# Altium PCB micro_mousev1.0.PcbDoc
Units mil, origin at the board's own origin, x right, y up, seen from the top; angles counter-clockwise.
Board outline 4698.17 x 3354.31 mil, 2 copper layers (Top Layer, Bottom Layer); 38 components, 52 nets, 196 pads, 25 vias.
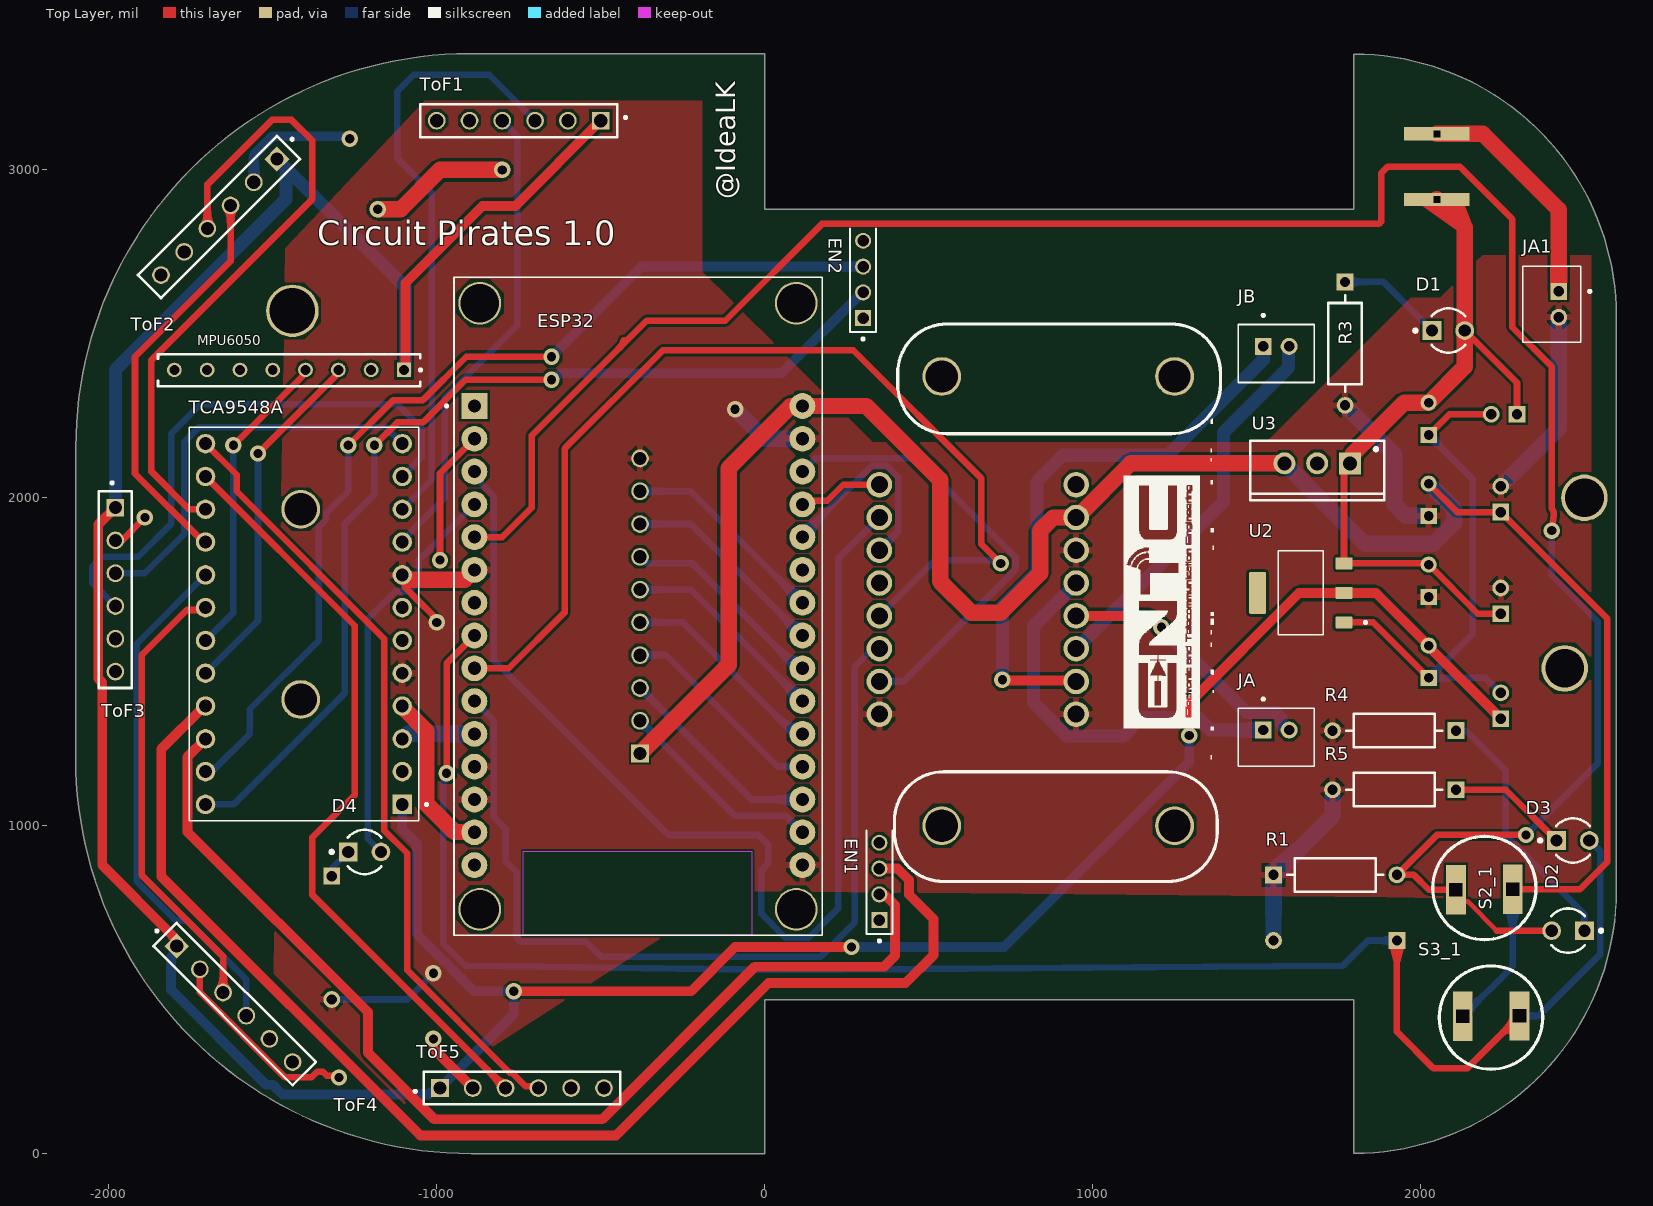
[diagram p0: Top Layer view]
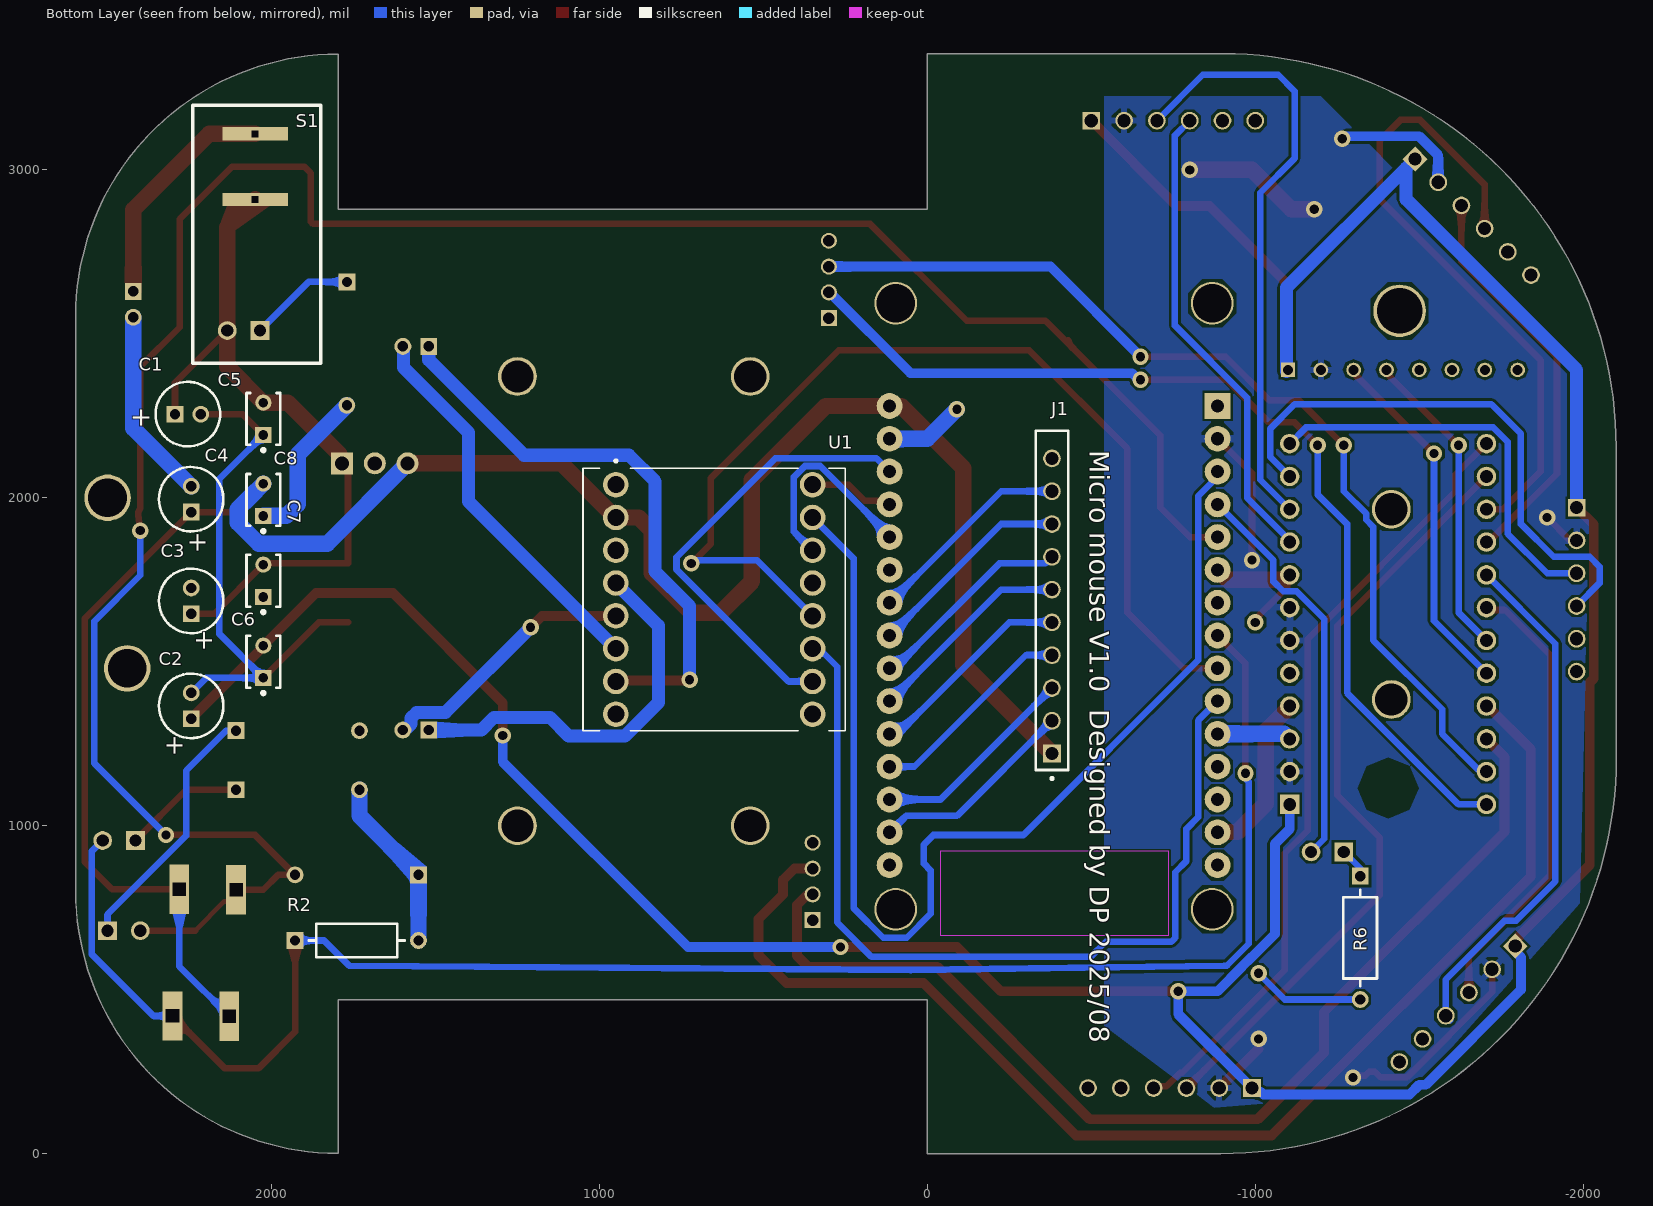
[diagram p1: Bottom Layer view, seen from below]
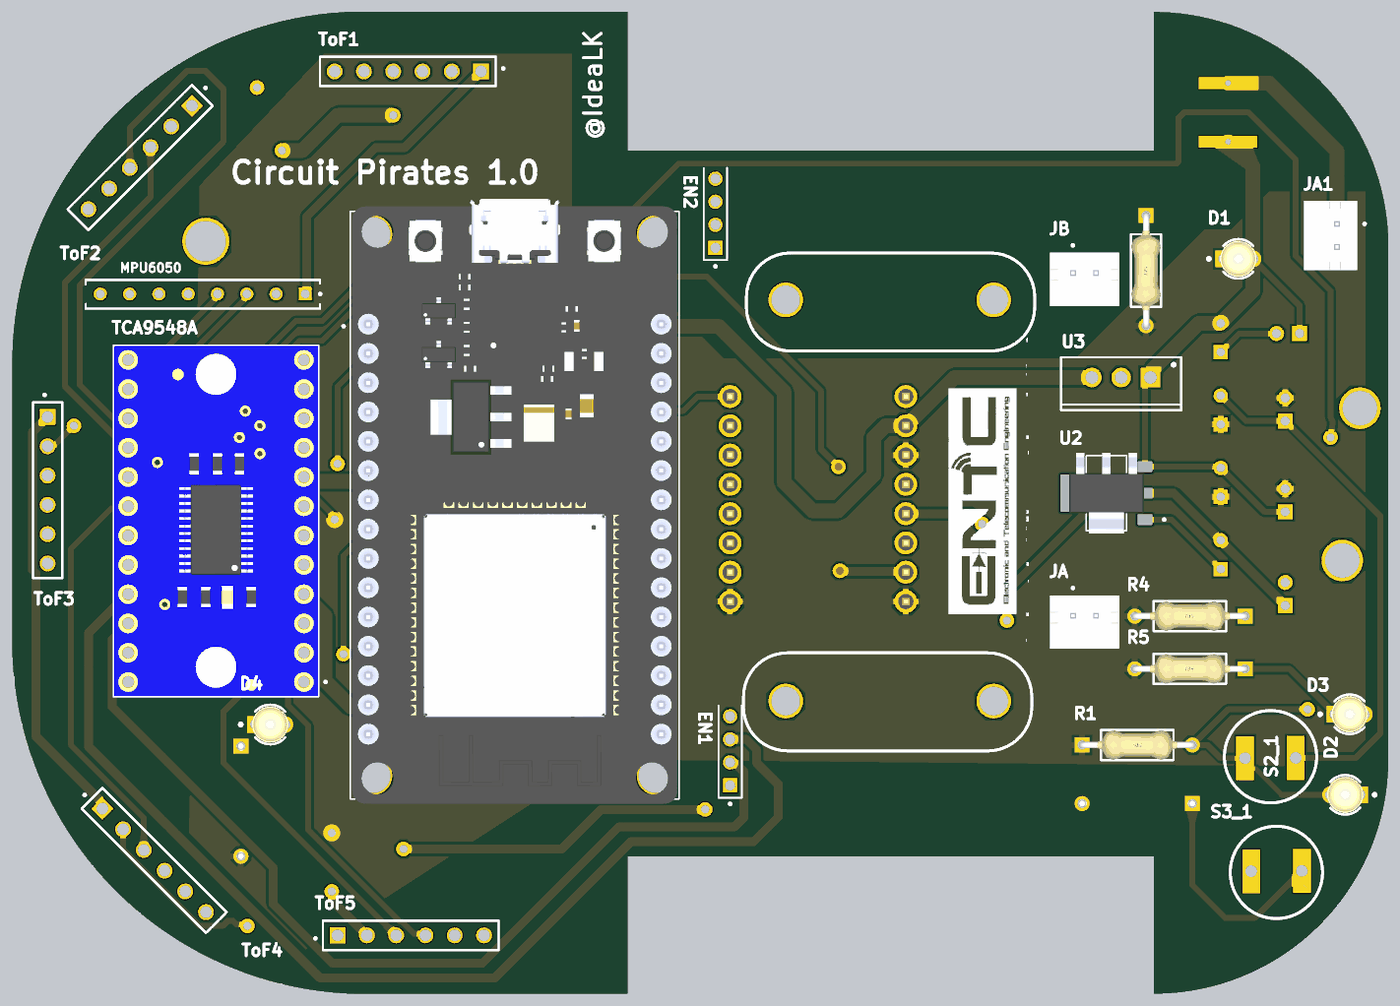
[diagram p2: 3D render of the assembled board from above, using the file's embedded part models]

## Layer stack, top to bottom
Top Solder: solder mask 0.4, Solder Resist, Dk 3.5
Top Layer: signal copper 1.4
Dielectric 1: dielectric 12.6, FR-4, Dk 4.8
Bottom Layer: signal copper 1.4
Bottom Solder: solder mask 0.4, Solder Resist, Dk 3.5

## Board outline
-895,0 -845,0 0,0 0,470 1797,470 1797,1 ccw(c1797,801) 2597,801 2597.19,801.19 2597.19,2552.81 ccw(c1797.19,2552.81) 1797.19,3352.81 1797.19,2880 0,2880 0,3354.31 -900.52,3354.31 ccw(c-900.52,2154.31) -2100.52,2154.31 -2100.52,1442.72 -2100.98,1205.98 ccw(c-895,1205.98)

## Design rules (kind name [scope] priority, off if disabled: settings)
BoardOutlineClearance [All] p1: gap=11.81 ignorepadtopadclearanceinfootprint=FALSE except(15.75: Arc-SplitBarrior Arc-SplitContinuation Track-SplitBarrior Track-SplitContinuation SMDPad-SplitBarrior SMDPad-SplitContinuation THPad-SplitBarrior THPad-SplitContinuation Via-SplitBarrior Via-SplitContinuation Fill-SplitBarrior Fill-SplitContinuation Poly-SplitBarrior Poly-SplitContinuation Region-SplitBarrior Region-SplitContinuation Text-SplitBarrior Text-SplitContinuation)
Clearance "Clearance Different Nets" [All] p1: gap=7.87 ignorepadtopadclearanceinfootprint=FALSE except(3.5: Arc-Arc Arc-Track Arc-SMDPad Track-Track Track-SMDPad; 5: SMDPad-SMDPad SMDPad-Via THPad-Via Via-Via; 10: Arc-Via Arc-Text Track-Via Track-Text SMDPad-Text THPad-Text Via-Text Fill-Text Poly-Text Region-Text Text-Text; 19.68: THPad-THPad Via-Hole)
Clearance "Clearance Same Nets" [All] p2: gap=7.87 ignorepadtopadclearanceinfootprint=FALSE except(3.5: Arc-Arc Arc-Track Arc-SMDPad Track-Track Track-SMDPad SMDPad-SMDPad; 5: SMDPad-Via THPad-Via; 10: Arc-Via Arc-Text Track-Via Track-Text SMDPad-Text THPad-Text Via-Via Via-Text Fill-Text Poly-Text Region-Text Text-Text)
Clearance "Clearance Bottom Layer" [OnLayer('Bottom Layer')] p3: gap=8 ignorepadtopadclearanceinfootprint=TRUE except(10: Arc-Text Track-Text SMDPad-Text THPad-Text Via-Text Fill-Text Poly-Text Region-Text Text-Text)
Clearance "Clearance Top Layer" [OnLayer('Top Layer')] p4: gap=8 ignorepadtopadclearanceinfootprint=TRUE except(10: Arc-Text Track-Text SMDPad-Text THPad-Text Via-Text Fill-Text Poly-Text Region-Text Text-Text)
HoleSize [All] p1: absolutevalues=TRUE maxlimit=248.03 minlimit=7.87 maxpercent=80.000 minpercent=20.000
MinimumAnnularRing [All] p1: minimumring=5.12
MinimumSolderMaskSliver [All] p1: minsoldermaskwidth=3.94
PolygonConnect PolygonConnect_1 [All] p1: thpad.connectstyle=Relief thpad.reliefconductorwidth=20 thpad.reliefentries=4 thpad.polygonreliefangle="90 Angle" thpad.airgapwidth=10 smdpad.connectstyle=Relief smdpad.reliefconductorwidth=20 smdpad.reliefentries=4 smdpad.polygonreliefangle="90 Angle" smdpad.airgapwidth=10 via.connectstyle=Direct via.reliefconductorwidth=20 via.reliefentries=4 via.polygonreliefangle="90 Angle" via.airgapwidth=10
RoutingCorners [All] p1: cornerstyle=Round minsetback=100 maxsetback=100
RoutingVias [All] p1: holewidth=19.68 width=39.37 viastyle="Through Hole" minholewidth=7.87 minwidth=13.78 maxholewidth=39.37 maxwidth=78.74
SilkToSilkClearance [All] p1: silktosilkclearance=3.94
SilkToSolderMaskClearance [IsPad] p1: minsilkscreentomaskgap=3.94 clearancetoexposedcopper=TRUE
SolderMaskExpansion [All] p1: expansion=4 istentingtop=FALSE
Width [All] p1: maxlimit=100 minlimit=3.5 preferedwidth=15
25 further rules are at their usual default settings.

## Classes and differential pairs
component class micro_mousev1.0: C1 C2 C3 C4 C5 C6 C7 C8 D1 D2 D3 D4 EN1 EN2 ESP32 J1 JA JA1 JB MPU6050 R1 R2 R3 R4 R5 R6 S1 S2_1 S3_1 ToF1 ToF2 ToF3 ToF4 ToF5 U2 U3

## Components (designator, comment, footprint, x,y, rotation, side; value= is the part's Value field where it differs from the comment)
C1 "ECA1HM100" CAPPR55-200-1100X500X1200 2255,2255 r180 bottom
C2 "ECA1HM100" CAPPR55-200-1100X500X1200 2245,1365.63 r90 bottom
C3 "ECA1HM100" CAPPR55-200-1100X500X1200 2245,1685.63 r90 bottom
C4 "ECA1HM100" CAPPR55-200-1100X500X1200 2245,1995.63 r90 bottom
C5 "K104K15X7RF5TL2" VISH-K104K15X7RF5TL2 2025,2240.79 r90 bottom
C6 "K104K15X7RF5TL2" VISH-K104K15X7RF5TL2 2025,1500 r90 bottom
C7 "K104K15X7RF5TL2" VISH-K104K15X7RF5TL2 2025,1746.93 r90 bottom
C8 "K104K15X7RF5TL2" VISH-K104K15X7RF5TL2 2025,1993.86 r90 bottom
D1 "HLMP-1719" FP-HLMP-1719-MFG 2085,2510 r0 top
D2 "HLMP-1719" FP-HLMP-1719-MFG 2450,680 r180 top
D3 "HLMP-1719" FP-HLMP-1719-MFG 2465,955 r0 top
D4 "HLMP-1719" FP-HLMP-1719-MFG -1220,920 r0 top
EN1 "Encoder" "Encoder 4 pin" 350,830 r270 top
EN2 "Encoder" "Encoder 4 pin" 300,2665.63 r270 top
ESP32 "Module_ESP32" MODULE_ESP32_DEVKIT_V1 -385,1669.17 r0 top
J1 "IR array" "IR array" -380,1220 r90 bottom
JA "B2B-PH-K-S" JST_B2B-PH-K-S 1560,1270 r180 top
JA1 "B2B-PH-K-S" JST_B2B-PH-K-S 2400,2590 r90 top
JB "B2B-PH-K-S" JST_B2B-PH-K-S 1560,2440 r180 top
MPU6050 "MPU 6050" "8 Pin MPU" -1200,2390 r180 top
R1 "PCF14JT7K50" FP-CF14-MFG 1740,850 r0 top
R2 "PCF14JT7K50" FP-CF14-MFG 1740,650 r180 bottom
R3 "PCF14JT7K50" FP-CF14-MFG 1770,2470 r270 top
R4 "PCF14JT7K50" FP-CF14-MFG 1920,1290 r180 top
R5 "PCF14JT7K50" FP-CF14-MFG 1920,1110 r180 top
R6 "PCF14JT7K50" FP-CF14-MFG -1320,658.19 r270 bottom
S1 "On Off Switch" Switch 2040,2800 r90 bottom
S2_1 "Push Botton" "Push botton" 2195,805 r180 top
S3_1 "Push Botton" "Push botton" 2215,420 r0 top
TCA9548A "Multiplexer" MODULE_2717 -1405,1615 r180 top
ToF1 "VL53L0X ToF" "VL53L0X ToF" -500,3150 r180 top
ToF2 "VL53L0X ToF" "VL53L0X ToF" -1487.16,3032.84 r225 top
ToF3 "VL53L0X ToF" "VL53L0X ToF" -1980,1970 r270 top
ToF4 "VL53L0X ToF" "VL53L0X ToF" -1792.84,632.84 r315 top
ToF5 "VL53L0X ToF" "VL53L0X ToF" -990,200 r0 top
U1 "TB6612FNG" TB6612FNG 650,1690 r180 bottom
U2 "AMS1117-3.3" SOT229P700X180-4N 1635,1710 r180 top
U3 "L7805ACV" TO220 1685,2105 r180 top

## Footprints (in the part's own frame and the unit in brackets; to place one, negate y for a bottom-side part, rotate by r counter-clockwise, add the part's x,y. Pads: shape width x height; smd on the part's side, far side on the other; paste and mask are expansions set on the pad)
"8 Pin MPU" [mil]
  rect 43.7x43.7 / inner round 43.7 / far side rect 43.7x43.7 hole 29.92: 01(-100,0)
  oval 45x43.7 hole 30: 02(0,0) 03(100,0) 04(200,0) 05(300,0) 06(400,0) 07(500,0) 08(600,0)
  silkscreen extent -154,-48 650,50
CAPPR55-200-1100X500X1200 [mm] "THD, 2-Leads, Dia 5mm, Body Length 11mm"
  rect 1.3x1.3 hole 0.8: 1(-1,0)
  round 1.3 hole 0.8: 2(1,0)
  silkscreen extent -2.5,-2.5 2.5,2.5, body extent -2.5,-2.5 2.5,2.5, height 12
"Encoder 4 pin" [mm]
  rect 1.24x1.24 / inner round 1.24 / far side rect 1.24x1.24 hole 0.89: 01(3,0)
  round 1.24 hole 0.89: 02(1,0) 03(-1,0) 04(-3,0)
  silkscreen extent -3.94,-1.02 4.7,1.02
FP-CF14-MFG [mm]
  rect 1.3x1.3 hole 0.8 paste-2539.97 mask+0: 1(-4.78,0)
  round 1.3 hole 0.8 paste-2539.97 mask+0: 2(4.78,0)
  silkscreen extent -3.73,-1.3 3.73,1.3, body extent -5.53,-1.4 5.53,1.4, height 0.25
FP-HLMP-1719-MFG [mm]
  rect 1.45x1.45 hole 0.95 paste-2539.97 mask+0: 1(-1.27,0)
  round 1.45 hole 0.95 paste-2539.97 mask+0: 2(1.27,0)
  silkscreen extent -2.67,-1.71 1.3,1.71, body extent -2.22,-2.22 2.22,2.22, height 0.25
"IR array" [mm]
  rect 1.37x1.37 hole 1.02: 01(0,0)
  round 1.37 hole 1.02: 02(5.08,0) 03(2.54,0) 04(7.62,0) 05(10.16,0) 06(12.7,0) 07(15.24,0) 08(17.78,0) 09(20.32,0) 10(22.86,0)
  silkscreen extent -2.02,-1.27 25.02,1.27
JST_B2B-PH-K-S [mm]
  rect 1.308x1.308 / inner round 1.308 / far side rect 1.308x1.308 hole 0.8: 1(1,-0.55)
  round 1.308 hole 0.8: 2(-1,-0.55)
  silkscreen extent -2.95,-3.05 2.95,2.25, body extent -2.95,-2.25 2.95,2.25, height 6
MODULE_2717 [mm]
  rect 1.508x1.508 / inner round 1.508 / far side rect 1.508x1.508 hole 1: 1(-7.62,13.97)
  round 1.508 hole 1: 2(-7.62,11.43) 3(-7.62,8.89) 4(-7.62,6.35) 5(-7.62,3.81) 6(-7.62,1.27) 7(-7.62,-1.27) 8(-7.62,-3.81) 9(-7.62,-6.35) 10(-7.62,-8.89) 11(-7.62,-11.43) 12(-7.62,-13.97) 13(7.62,-13.97) 14(7.62,-11.43) 15(7.62,-8.89) 16(7.62,-6.35) 17(7.62,-3.81) 18(7.62,-1.27) 19(7.62,1.27) 20(7.62,3.81) 21(7.62,6.35) 22(7.62,8.89) 23(7.62,11.43) 24(7.62,13.97)
  round 3.516 on Top Overlay: P1(0,12.7) P2(0,-12.7)
  silkscreen extent -9.6,-15.24 8.89,15.24, body extent -8.89,-15.24 8.89,15.24, height 1.2
MODULE_ESP32_DEVKIT_V1 [mm]
  rect 2x2 / inner round 2 / far side rect 2x2 hole 1.02: 1(-12.7,15.515)
  round 2 hole 1.02: 2(-12.7,12.975) 3(-12.7,10.435) 4(-12.7,7.895) 5(-12.7,5.355) 6(-12.7,2.815) 7(-12.7,0.275) 8(-12.7,-2.265) 9(-12.7,-4.805) 10(-12.7,-7.345) 11(-12.7,-9.885) 12(-12.7,-12.425) 13(-12.7,-14.965) 14(-12.7,-17.505) 15(-12.7,-20.045) 16(12.7,-20.045) 17(12.7,-17.505) 18(12.7,-14.965) 19(12.7,-12.425) 20(12.7,-9.885) 21(12.7,-7.345) 22(12.7,-4.805) 23(12.7,-2.265) 24(12.7,0.275) 25(12.7,2.815) 26(12.7,5.355) 27(12.7,7.895) 28(12.7,10.435) 29(12.7,12.975) 30(12.7,15.515)
  round 3.302 hole 3 unplated: ""(-12.28,-23.475) ""(-12.28,23.475) ""(12.23,-23.475) ""(12.23,23.475)
  Keep-Out Layer region: 8.78,-25.475 -8.91,-25.475 -8.91,-18.985 8.78,-18.985
  Keep-Out Layer region: 8.78,-25.475 -8.91,-25.475 -8.91,-18.985 8.78,-18.985
  silkscreen extent -14.95,-25.48 14.23,25.48, body extent -14.1,-25.9 14.1,26.55, height 7.05
"Push botton" [mil]
  rect 60x150 / inner rect 40x200 / far side rect 60x150 hole 40 square: 1(87,0) 2(-86,-1)
  silkscreen extent -157,-162 157,152
SOT229P700X180-4N [mm]
  rrect15% 1.31x0.93 smd: 1(-3.345,2.29) 2(-3.345,0) 3(-3.345,-2.29)
  rrect15% 1.31x3.24 smd: 4(3.345,0)
  silkscreen extent -5.1,-3.25 1.75,3.25, body extent -3.25,-3.5 3.25,3.5, height 1.8
Switch [mil]
  rect 40x200 hole 20 square: 1(310,10) 2(110,10)
  silkscreen extent -390,-190 397,200
TB6612FNG [mm]
  round 1.98 hole 1.32: 1(-7.62,8.89) 2(-7.62,6.35) 3(-7.62,3.81) 4(-7.62,1.27) 5(-7.62,-1.27) 6(-7.62,-3.81) 7(-7.62,-6.35) 8(-7.62,-8.89) 9(7.62,-8.89) 10(7.62,-6.35) 11(7.62,-3.81) 12(7.62,-1.27) 13(7.62,1.27) 14(7.62,3.81) 15(7.62,6.35) 16(7.62,8.89)
  silkscreen extent -10.16,-10.16 10.16,10.83, body extent -10.16,-10.16 10.16,10.16, height 5.5
TO220 [mm] "TO, Thru-Hole, Vertical, Heatsink Mounted; 3 In-Line Leads; Pitch 2.54 mm"
  rect 1.7x1.7 hole 1.1: 1(-2.54,0)
  round 1.7 hole 1.1: 2(0,0) 3(2.54,0)
  silkscreen extent -5.2,-1.75 5.2,2.85, body extent -5.25,-1.8 5.25,2.9, height 19.7
VISH-K104K15X7RF5TL2 [mm] "THD, 2-Leads, Body 4x2.6mm"
  rect 1.25x1.25 hole 0.75: 1(-1.25,0)
  round 1.25 hole 0.75: 2(1.25,0)
  silkscreen extent -2.55,-1.3 2,1.3, body extent -2,-1.3 2,1.3, height 5.6
"VL53L0X ToF" [mm]
  rect 1.37x1.37 hole 1.02: 01(0,0)
  round 1.37 hole 1.02: 02(2.54,0) 03(5.08,0) 04(7.62,0) 05(10.16,0) 06(12.7,0)
  silkscreen extent -2.02,-1.27 13.97,1.27

## Part data
C1 C2 C3 C4: library part CMP-1665-00038-2, "Aluminum Electrolytic Capacitor, 10 uF, +/- 20%, 50 V, -40 to 85 degC, 2-Pin THD, RoHS, Bulk", Capacitance=10uF, Case/Package=Radial, Dielectric Material=Aluminium, Leakage Current=3uA, Manufacturer=Panasonic, Max Operating Temperature=85degC, Min Operating Temperature=-40degC, Package Description="2-Pin Radial Lead, Dia 5 mm, Height 12 mm", Package Quantity=200, Package Reference=CAPPR55-200-1100X500X1200, Ripple Current=65mA, Tolerance=20%, Voltage=50V, Datasheet URL=https://industrial.panasonic.com/cdbs/www-data/pdf/RDF0000/ABA0000C1218.pdf, Datasheet Version="Rev. 05, 10/2016", Diameter=5mm, Dissipation Factor=0.12%, Height=11mm, Height - Seated (Max)=0.472inch, Lead Diameter=0.5mm, Lead Free=LeadFree, Lead Pitch=2mm, Lead/Base Style=Straight, Length=11mm, Life (Hours)=2000Hour, Manufacturer URL=http://www.panasonic.com/, Mount=ThroughHole, Number of Pins=2, Packaging=Bulk, Radiation Hardening=No, REACH SVHC=NoSVHC, Ripple Current (AC)=65mA, RoHSCompliant=true, Termination=Radial, Voltage Rating=50V, Voltage Rating (DC)=50V
C5 C6 C7 C8: library part CMP-2000-06508-1, "Ceramic Capacitor, 100 nF, +/- 10%, 50 V, -55 to 125 degC, 2-Pin THD, RoHS, Tape and Reel", Capacitance=0.1µF, Manufacturer=Vishay, Operating Temperature=-55°C~125°C, Package / Case=Radial, Package Description="2-Pin Through Hole Device, Body 4 x 2.6 mm", Ratings=-, Standard Package=1, Temperature Coefficient=X7R, Tolerance=±10%, Voltage - Rated=50V, Applications=GeneralPurpose, Catalog Drawings=Mono-KapSide2-15_5.58Mono-KapSide1_15, Category=Capacitors, Datasheet URL=http://www.vishay.com/docs/45171/kseries.pdf, Datasheet Version=08/2013, Family=CeramicCapacitors, Features=-, Height - Seated (Max)="0.220\"(5.58mm)", Lead Spacing="0.098\"(2.50mm)", Lead Style=Straight, Manufacturer URL=http://www.vishay.com/, Mounting Technology=ThroughHole, Mounting Type=ThroughHole, Online Catalog=Mono-Kap™Series, Other Names=BC1084CT, Package Reference=K104K15X7RF5TL2, Packaging=CutTape(CT), Series=Mono-Kap™K, Size / Dimension="0.157\"Lx0.098\"W(4.00mmx2.50mm)", Thickness (Max)=-
D1 D2 D3 D4: library part CMP-2000-06410-2, "LED YELLOW DIFFUSED T-1 T/H", Colour=Yellow, Forward Current=2mA, Forward Voltage=1.8V, Manufacturer=Broadcom, Package=0, Power Dissipation=17.5mW, Reverse Voltage=5V, Temperature="-40°C to +100°C", Temperature Range High=+100°C, Temperature Range Low=-40°C, Automotive=No, Category=Diode, ComponentLink2Description=Datasheet, ComponentLink2URL=https://docs.broadcom.com/docs/AV02-1557EN, Device Class L1=Optoelectronics, Device Class L2=LEDs, Device Class L3=unset, Digikey Description="LED YELLOW DIFFUSED T-1 T/H", Lead Free=Yes, Led Orientation=Straight, Luminous Intensity=2.1mcd, Manufacturer Part Number=HLMP-1719, Mouser Description="Standard LEDs - Through Hole Yellow Diffused 585nm 2.1mcd", Octopart=https://octopart.com/hlmp-1719-broadcom-71130405, RoHS=TRUE, Viewing Angle=50°, Wavelength=585nm
EN1 EN2: "Variable Post Height Header Strips, 2.00 mm Pitch", Package=None, Check_prices=https://www.snapeda.com/parts/MTMM-104-08-T-S-315/Samtec/view-part/?ref=eda, MF=SAMTEC, MP=MTMM-104-08-T-S-315, SnapEDA_Link=https://www.snapeda.com/parts/MTMM-104-08-T-S-315/Samtec/view-part/?ref=snap
J1 ToF1 ToF2 ToF3 ToF4 ToF5: Package=None, Availability=Unavailable, Price=None
  J1: MP=TSW-210-15-L-S
  ToF1 ToF2 ToF3 ToF4 ToF5: MP=ZW-06-09-L-S-312-160
JA JA1 JB: "Connector Header Through Hole 2 position 0.079 (2.00mm)", Package=None, Check_prices=https://www.snapeda.com/parts/B2B-PH-K-S/JST/view-part/?ref=eda, MF="JST Sales America Inc.", MP=B2B-PH-K-S, SnapEDA_Link=https://www.snapeda.com/parts/B2B-PH-K-S/JST/view-part/?ref=snap
MPU6050: "CONN HDR .050 8POS", Package=None, Check_prices=https://www.snapeda.com/parts/MTMS-108-02-T-S-100/Samtec/view-part/?ref=eda, MF=Samtec, MP=MTMS-108-02-T-S-100, SnapEDA_Link=https://www.snapeda.com/parts/MTMS-108-02-T-S-100/Samtec/view-part/?ref=snap
R1 R2 R3 R4 R5 R6: library part CMP-26528-000003-1, "RES 7.5K OHM 1/4W 5% AXIAL", Case/Package=Axial, Max Operating Temperature=155°C, Max Power Dissipation=250mW, Min Operating Temperature=-55°C, Resistance=7.5kR, Resistor Type="Carbon Film", Temperature Coefficient=-400ppm/°C, Tolerance=5%, Contact Plating=Tin, Diameter=2.3mm, Features="Flame Retardant Coating", Lead Free="Lead Free", Length=0.256inch, Mount="Through Hole", Number of Terminations=2, Packaging="Tape and Reel", Power Rating=250mW, Radiation Hardening=No, RoHS Compliant=Yes, Series=CF
TCA9548A: "Module: multiplexer; I2C interface multiplexer; TCA9548A; 3Ã·5VDC", Package=None, Check_prices=https://www.snapeda.com/parts/2717/Adafruit+Industries/view-part/?ref=eda, MF=Adafruit, MP=2717, SnapEDA_Link=https://www.snapeda.com/parts/2717/Adafruit+Industries/view-part/?ref=snap
U1: "TB6612FNG Motor Controller/Driver Power Management Evaluation Board", Package=None, Availability="In Stock", Check_prices=https://www.snapeda.com/parts/ROB-14450/SparkFun%20Electronics/view-part/2656367/?ref=eda, MF="SparkFun Electronics", MP=ROB-14450, Price=None, SnapEDA_Link=https://www.snapeda.com/parts/ROB-14450/SparkFun%20Electronics/view-part/2656367/?ref=snap
U2: "Sot223/Pkg 1-Amp 3.3-Volt Low Drop Out Voltage Regulatator", Package="SOT-223 Seeed Technology", Check_prices=https://www.snapeda.com/parts/AMS1117-3.3/Advanced+Monolithic+Systems/view-part/?ref=eda, MF="Advanced Monolithic Systems", MP=AMS1117-3.3, SnapEDA_Link=https://www.snapeda.com/parts/AMS1117-3.3/Advanced+Monolithic+Systems/view-part/?ref=snap
U3: library part CMP-0244-00484-1, "Positive Voltage Regulator, 5V, 3-Pin TO-220", ComponentLink1Description="Manufacturer URL", ComponentLink1URL=http://www.st.com, ComponentLink2Description=Datasheet, ComponentLink2URL=http://www.st.com/internet/com/TECHNICAL_RESOURCES/TECHNICAL_LITERATURE/DATASHEET/CD00000444.pdf, ComponentLink3Description="Package Specification", ComponentLink3URL=http://www.st.com/internet/com/TECHNICAL_RESOURCES/TECHNICAL_LITERATURE/PACKAGE_INFORMATION/CD00004649.pdf, DatasheetVersion=16/11/2011, PackageDescription="TO, Thru-Hole, Vertical, Heatsink Mounted; 3 In-Line Leads; Pitch 2.54 mm", PackageReference=TO220, PackageVersion=ver3.0

## Free pads (board coordinates)
  round 160 hole 138.43: 11(-1440,2570)
  round 118.11 hole 98.43: 13(540,2370) 14(1250,2370) 15(1250,1000) 16(540,1000) w1(-1415,1385) w2(-1415,1965)
  round 141.73 hole 118.11: 17(2440,1480) 18(2500,2000)

## Via types
v1: diameter 50, hole 28, Top Layer to Bottom Layer, 25 vias

## Nets (pads, with @x,y where several pads share a name; then routed paths per layer and width w, separated by ;. In a path a pad name is that pad's centre, name@x,y a point inside that pad or via, vN(x,y) a via of type N, cw(c..) or ccw(c..) an arc to the next point about the centre after c; other vN are vias at no path point)
3.3V: C2.1 C6.2 MPU6050.01 TCA9548A.1 ToF1.01 ToF2.01 ToF3.01 ToF4.01 ToF5.01 U2.2 | length 10642.3
  Top Layer w30: ToF3.01@-1977.71,1972.29 -2031.97,1918.03 -2031.97,1448.47 -2020,1436.51 -2020,880 -1803.73,663.73 -1803.73,660.66 -1792.84,649.77 ToF4.01 ; MPU6050.01@-1095,2385 -1095,2655 -860,2890 -760,2890 ToF1.01 ; v1(-765,495) -225,495 -90,630 v1(265,630) ; v1(1295,1275) 1295,1375 1630,1710 U2.2 1864.21,1710 C6.2 2025,1546.26 C2.1
  Bottom Layer w30: ToF4.01 -1792.84,615.92 -1810,598.76 -1810,500 -1520,210 -1500,210 -1470,180 -1024.54,180 -1016.51,188.03 -1001.97,188.03 -765,425 v1(-765,495) -885,495 -960,570 -960,570.71 -989.29,600 -990,600 -1060,670 -1060,945 -1105,990 TCA9548A.1 ; v1(265,630) 730,630 1295,1195 v1(1295,1275)
  Bottom Layer w40: ToF3.01 -1980,2390 -1460,2910 -1460,3005.69 ; ToF2.01 -1460,3005.69 ; MPU6050.01@-1095,2385 -1095,2640.69 -1460,3005.69
5V: C4.1 C8.2 ESP32.30 J1.01 S2_1.2 S3_1.2 U1.2 U3.3 | length 6489.1
  Top Layer w20: C8.2 2111.81,1956.26 C4.1 2570,1631.26 2570,890 2486,806 S2_1.2
  Top Layer w50: J1.01 -110,1490 -110,2090 80,2280 ESP32.30 310,2280 535,2055 535,1745 630,1650 720,1650 840,1770 840,1900 880,1940 U1.2 ; U1.2@951.61,1940 1116.61,2105 U3.3
  Bottom Layer w20: S3_1.2 2281,571 S2_1.2
  Bottom Layer w50: U3.3 1830,1860 2039.06,1860 2102.86,1923.79 2102.86,1965.5 2064.1,2004.25 2063.82,2004.25 C8.2
AGND: C3.2 C4.2 C7.1 C8.1 ESP32.6 ESP32.12 ESP32.13 ESP32.16 ESP32.29 J1.10 JA1.2 R1.1 R2.2 R3.2 R4.2 R5.2 R6.2 TCA9548A.5 TCA9548A.8 U1.3 U1.8 U1.9 | length 2611.4
  Top Layer w20: TCA9548A.8 -1097.66,1757.66 -1097.66,1727.93 -1055.31,1685.58 -1013.76,1644.02 -1013.76,1641.88 v1@-1000,1628.12
  Top Layer w50: TCA9548A.8 -1090,1750 -915,1750 ESP32.6
  Bottom Layer w20: R6.2 -1090,470 v1(-1010,550)
  Bottom Layer w50: v1(-90,2270) 0,2180 ESP32.29 ; R2.2 R1.1 1731.81,1030 R5.2 ; R3.2 1920,2131.81 1920,1980 1955.35,1944.65 C8.1 ; C4.2 2421.65,2211.65 JA1.2
  other v1: -1000,1620
D2: D4.2 ESP32.4 | length 1234.9
  Bottom Layer w20: D4.2 -1210,960 -1210,1630.27 -1125.58,1714.69 -1085.05,1714.69 -1055.31,1744.42 -1055.31,1809.69 ESP32.4
D4: D2.2 ESP32.5 R1.2 S2_1.1 | length 6997.2
  Top Layer w15: S2_1.1 2108,791.92 2130.5,769.42 2143.58,769.42 2233,680
  Top Layer w20: ESP32.5 -800,1880 -710,1970 -710,2190 -430,2470 ; -430,2480 -430,2470 ; S2_1.1 2025,805 1980,850 R1.2 2050.01,971.82 v1(2321.82,971.82) ; 2233,680 D2.2 ; v1(2400,1900) 2406.72,1946.95 2406.72,1954.41 2400,1968.93 2400,1973.51 2400,2400 2280,2520 2280,2850 2120,3010 1900,3010 1880,2990 1880,2841.88 1873.12,2835 175,2835 -120,2540 -360,2540 -430,2470
  Bottom Layer w20: v1(2321.82,971.82) 2540,1190 2540,1623.64 2400,1763.64 v1(2400,1900)
D5: D3.2 ESP32.8 R2.1 S3_1.1 | length 5396.5
  Top Layer w20: v1(-970,1160) -970,1495 ESP32.8 ; R2.1 1928.19,371.81 2040,260 2142,260 S3_1.1
  Bottom Layer w20: v1(-970,1160) -975.74,1154.26 -975.74,1137.54 -980,1133.28 -980,640.21 -925,585.21 -925,585 -919.13,579.12 -913.38,573.38 -905.26,573.27 49.92,560 50.14,560 1763.5,573.5 1840,650 R2.1 ; S3_1.1 2360,420 2548.54,608.54 2548.54,921.46 D3.2
D12: ESP32.27 U1.16 | length 259.9
  Top Layer w20: ESP32.27 126.24,1991.24 191.24,1991.24 240,2040 U1.16
D13: ESP32.28 U1.10 | length 1385.4
  Bottom Layer w20: ESP32.28 155.35,2120.35 463.29,2120.35 765,1818.64 765,1781.36 423.64,1440 U1.10
D14: ESP32.26 U1.14 | length 645.7
  Bottom Layer w20: ESP32.26 115,1885.4 326.45,2096.85 373.55,2096.85 406.85,2063.55 406.85,1896.85 U1.14
D15: ESP32.3 U1.15 | length 3434.3
  Bottom Layer w20: ESP32.3 -885,2064.11 -867.38,2046.49 -867.38,2046.35 -825.63,2004.59 -825.63,1504.59 -292.77,971.73 -18.62,971.73 10.67,942.44 10.67,884.48 -10,863.81 -10,731.25 62.67,658.57 134.74,658.57 225,748.83 225,1815 U1.15
D18: ESP32.9 U1.12 | length 3130.6
  Top Layer w20: ESP32.9 -780,1480 -610,1650 -610,2150 -310,2450 270,2450 660,2060 660,1860 v1(720,1800)
  Bottom Layer w20: U1.12 520,1810 710,1810 v1(720,1800)
D19: ESP32.10 U1.11 | length 2751.6
  Bottom Layer w20: ESP32.10 -825.63,1320.63 -825.63,1025.63 -790,990 -790,892.27 -755.79,858.06 -755.79,657.94 -744.07,646.22 -543.95,646.22 -497.73,600 170,600 275,705 275,1485 314.64,1524.64 318.96,1524.64 334.32,1540 U1.11
D23: ESP32.15
D25: ESP32.23 J1.08 | length 635.8
  Bottom Layer w20: J1.08 -225,1920 ESP32.23
D26: ESP32.24 J1.09 | length 635.8
  Bottom Layer w20: J1.09 -225,2020 ESP32.24
D27: ESP32.25
D32: ESP32.21 J1.06 | length 635.8
  Bottom Layer w20: J1.06 -225,1720 ESP32.21
D33: ESP32.22 J1.07 | length 635.8
  Bottom Layer w20: J1.07 -360,1800 -220,1800 100,1480 ESP32.22
D34: ESP32.19 J1.04 | length 635.8
  Bottom Layer w20: J1.04 -300,1520 40,1180 ESP32.19
D35: ESP32.20 J1.05 | length 635.8
  Bottom Layer w20: J1.05 -250,1620 78.76,1291.24 103.76,1291.24 ESP32.20
D36: ESP32.17 J1.03 | length 635.8
  Bottom Layer w20: J1.03 -90,1030 65,1030 ESP32.17
D39: ESP32.18 J1.02 | length 635.8
  Bottom Layer w20: J1.02 -40,1080 ESP32.18
DGND: ESP32.2 MPU6050.02 TCA9548A.2 TCA9548A.6 TCA9548A.7 ToF1.02 ToF2.02 ToF3.02 ToF4.02 ToF5.02 | length 2180.5
  Top Layer w20: ToF3.02 -1960,1870 v1(-1890,1940) ; ToF4.02 -1722.13,492.13 -1462.32,232.32 -1382.27,232.32 -1364.95,249.64 -1346.97,249.64 -1335.21,237.88 -1303.6,237.88 v1(-1297.86,232.14) ; -1010,320 v1(-1010,350) ; v1(-990,1810) -990,2075 ESP32.2
  Top Layer w30: -1010,320 ToF5.02
  Top Layer w50: v1(-1180,2880) -1110,2880 -990,3000 v1(-800,3000)
  Bottom Layer w30: ToF2.02 -1557.87,3044.55 -1500,3102.42 -1277.83,3102.42 -1270.41,3095 v1(-1265,3095)
NetC1_2: C1.2 C2.2 C5.1 C6.1 U2.1 | length 1636.8
  Top Layer w20: U2.1 1855.94,1619.84 C6.1 ; C5.1 2088.43,2255 C1.2
  Bottom Layer w20: C5.1 2160,2056.57 2160,1585.79 C6.1 2199.21,1450.79 C2.2
NetD1_1: D1.1 R3.1 | length 326.4
  Bottom Layer w20: R3.1 1886.81,2658.19 D1.1
NetD2_1: D2.1 R4.1 | length 789.9
  Bottom Layer w20: R4.1 2138.19,1290 2260,1168.19 2260,970 2500,730 D2.1
NetD3_1: D3.1 R5.1 | length 371
  Top Layer w20: R5.1 2260,1110 D3.1
NetD4_1: D4.1 R6.1 | length 94.3
  Bottom Layer w20: R6.1 -1320,870 D4.1
NetJA1_1: JA1.1 S1.1 | length 716.6
  Top Layer w50: S1.1 2190,3110 2421.65,2878.35 JA1.1
NetJA_1: JA.1 U1.4 | length 1200.8
  Bottom Layer w40: U1.4 820,1610 820,1375.46 922.31,1273.15 1093.77,1273.15 1150.62,1330 1322.07,1330 1360.42,1291.65 JA.1
NetJA_2: JA.2 U1.5 | length 804.7
  Top Layer w30: U1.5 1175,1640 v1(1210,1605)
  Bottom Layer w40: v1(1210,1605) 1469.72,1345.28 1557.92,1345.28 1574.25,1328.95 1574.25,1310.14 1586.99,1297.4 1590.51,1297.4 1596.26,1291.65 JA.2
NetJB_1: JB.1 U1.7 | length 1760.7
  Top Layer w15: v1(725,1445) v1@727.5,1442.5 ; U1.7@947.5,1442.5 U1.7
  Top Layer w30: v1@727.5,1442.5 U1.7@947.5,1442.5
  Bottom Layer w40: v1(725,1445) 725,1670 830,1775 830,2050 909.77,2129.77 1229.77,2129.77 1520.63,2420.63 JB.1
NetJB_2: JB.2 U1.6 | length 1190.6
  Bottom Layer w40: U1.6 1399.56,1989.56 1399.56,2199.56 1597.17,2397.17 1597.17,2459.45 JB.2
SCL: ESP32.14 TCA9548A.4 | length 511.3
  Top Layer w50: TCA9548A.4 -1105,1362.46 -1032.5,1289.96 -1032.5,1067.5 -945.87,980.87 -885.87,980.87 ESP32.14
SCL0: TCA9548A.10 ToF1.03 | length 1854.5
  Bottom Layer w20: TCA9548A.10 -1015,2055 -1015,2930 -1120,3035 -1120,3240 -1070,3290 -840,3290 ToF1.03
SCL1: TCA9548A.12 ToF3.03 | length 1246.8
  Bottom Layer w20: ToF3.03@-1982.9,1770 -1890,1770 -1770,1890 -1770,2170.27 -1725.58,2214.69 -1154.69,2214.69 TCA9548A.12
SCL2: TCA9548A.14 ToF5.03 | length 2351.7
  Top Layer w20: TCA9548A.14 -1250,1610 -1250,1093.45 -1380,963.45 -1380,790 ToF5.03
SCL3: TCA9548A.16 ToF2.03 | length 1248.8
  Top Layer w20: TCA9548A.16 -1711.57,1865 -1920,2073.43 -1920,2430 -1628.58,2721.42 ToF2.03@-1628.58,2900.19
SCL4: TCA9548A.18 ToF4.03 | length 1386.6
  Top Layer w20: TCA9548A.18 -1712.53,1657.47 -1762.53,1657.47 -1900,1520 -1900,850 -1651.42,601.42 ToF4.03
SCL5: MPU6050.03 TCA9548A.20 | length 1089.8
  Top Layer w20: v1(-1545,2135) MPU6050.03@-1295,2385
  Bottom Layer w20: TCA9548A.20 -1545,1625 v1(-1545,2135)
SCL6: EN1.02 TCA9548A.22 | length 3320.7
  Top Layer w30: TCA9548A.22 -1759.69,1210.31 -1759.69,981.23 -1210,431.55 -1210,307.57 -1007.43,105 -495,105 -30,570 363.94,570 397.28,603.35 397.28,757.72 367.97,787.03 353.6,787.03 EN1.02
SCL7: EN2.02 TCA9548A.24 | length 3041.2
  Top Layer w20: v1(-1190,2160) -1120,2230 -1042.02,2230 -912.02,2360 v1(-650,2360)
  Bottom Layer w20: TCA9548A.24 -1620,1065 -1280,1405 -1280,1920 -1190,2010 v1(-1190,2160)
  Bottom Layer w30: v1(-650,2360) -644.59,2360 -624.59,2380 51.31,2380 297.57,2626.26 EN2.02
SDA: ESP32.11 TCA9548A.3 | length 226.2
  Bottom Layer w50: TCA9548A.3 -1102.46,1265 -1087.46,1280 ESP32.11
SDA0: TCA9548A.9 ToF1.04 | length 1448.6
  Bottom Layer w20: TCA9548A.9 -1105,1870 -975,2000 -975,2305 -755,2525 -755,3105 ToF1.04
SDA1: TCA9548A.11 ToF3.04 | length 1721
  Bottom Layer w20: ToF3.04 -2050,1740 -2050,1790 -2020,1820 -1910,1820 -1810,1920 -1810,2195 -1720,2285 -1120,2285 -1045,2210 -1045,2125 TCA9548A.11
SDA2: TCA9548A.13 ToF5.04 | length 2408.9
  Top Layer w20: TCA9548A.13 -1610,2070 -1610,2020 -1159.69,1569.69 -1159.69,985.41 -1090,915.72 -1090,560 -776.97,246.97 -770.55,246.97 -728.86,205.28 -695.28,205.28 ToF5.04
SDA3: TCA9548A.15 ToF2.04 | length 1987.2
  Top Layer w20: TCA9548A.15 -1755,1965 -1870,2080 -1870,2420 -1380,2910 -1380,3090 -1442.42,3152.42 -1502.58,3152.42 -1699.29,2955.71 ToF2.04
SDA4: TCA9548A.17 ToF4.04 | length 1608.9
  Bottom Layer w20: TCA9548A.17 -1915,1555 -1915,830 -1795,710 -1760,710 -1580.71,530.71 ToF4.04 ToF4.04@-1593.92,407.5
SDA5: MPU6050.04 TCA9548A.19 | length 948.4
  Top Layer w20: v1(-1620,2160) MPU6050.04@-1395,2385
  Bottom Layer w20: TCA9548A.19 -1620,1650 v1(-1620,2160)
SDA6: EN1.03 TCA9548A.21 | length 3853.4
  Top Layer w30: TCA9548A.21 -1708.6,1365 -1840,1233.6 -1840,845 -1050,55 -452.92,55 12.08,520 430,520 515,605 515,715.47 440,790.47 440,835 405.63,869.37 EN1.03
SDA7: EN2.03 TCA9548A.23 | length 2982.6
  Top Layer w20: v1(-1270,2160) -1132.13,2297.87 -1042.13,2297.87 -910,2430 v1(-650,2430)
  Bottom Layer w20: TCA9548A.23 -1697.47,1172.53 -1677.47,1172.53 -1570,1280 -1570,1355 -1360,1565 -1360,1911.21 -1338.07,1933.14 -1338.07,1951.93 -1270,2020 v1(-1270,2160)
  Bottom Layer w30: v1(-650,2430) -375,2705 EN2.03
Vcc: C1.1 C3.1 C5.2 C7.2 D1.2 S1.2 U2.3 U3.1 | length 2204.6
  Top Layer w20: U3.1 1766.69,2086.69 U2.3 2020.98,1800.16 C7.2 2174.88,1646.26 C3.1 ; D1.2 2294.37,2350.63 C1.1
  Top Layer w50: U3.1 1793.46,2113.46 1793.46,2133.46 1950,2290 C5.2 2135,2400 D1.2 2135,2825 S1.2
pads on no net: EN1.01 EN1.04 EN2.01 EN2.04 ESP32. ESP32.1 ESP32.7 MPU6050.05 MPU6050.06 MPU6050.07 MPU6050.08 TCA9548A.P1 TCA9548A.P2 ToF1.05 ToF1.06 ToF2.05 ToF2.06 ToF3.05 ToF3.06 ToF4.05 ToF4.06 ToF5.05 ToF5.06 U1.1 U1.13 U2.4 U3.2

## Polygon pours and split planes (outlines as drawn)
DGND on Bottom Layer "DGND_L02_P001" (solid, remove dead copper, pour order 1): -1200,3225 -540,3225 -540,390 -875,140 -1480,190 -1989.35,762.88 -2028.26,2396.74
AGND on Top Layer "AGND_L01_P000" (solid, remove dead copper, pour order 0): -1036.71,3210 -190,3210 -190,2690 330,2170 1530,2170 1970,2610 2060,2610 2190,2740 2520,2740 2520,775 -94,801 -1099.07,150.93 -1497.09,548.95 -1461.13,2760.23

## Silkscreen, mask and mechanical layers (free items; w line width, h text height)
Top Overlay:
  drawing of 45 lines, arcs and shapes, not listed
  text "@IdeaLK" at -90,2910 h60 r90
  text "Circuit Pirates 1.0" at -1365,2770.02 h75
Bottom Overlay:
  text "Micro mouse V1.0  Designed by DP 2025/08" at -495,2145 h60 r90
Mechanical 1:
  lines w10: 2597,801 cw(c1797,801) 1797,1 1797,470 0,470 0,0 -845,0 ; 2597.19,801.19 2597.19,2552.81 ccw(c1797.19,2552.81) 1797.19,3352.81 1797.19,3322.81 1797.19,2880 0,2880 0,3354.31 -900.52,3354.31 ccw(c-900.52,2154.31) -2100.52,2154.31 -2100.52,1917.11 -2100.52,1442.72 -2100.98,1205.98 ccw(c-895,1205.98) -895,0 -845,0 ; -845,0 -845,0 ; 541.34,735 1250,735 1250,875 541.34,875 541.34,735

## Text inside footprints (layer, text, board x,y; h text height)
C1: Bottom Overlay "+" at 2430,2220 h59.06
C2: Bottom Overlay "+" at 2270,1210 h59.06 r270
C3: Bottom Overlay "+" at 2180,1530 h59.06 r270
C4: Bottom Overlay "+" at 2200,1830 h59.06 r270